# EAGLE board Discrete Datalogger ECU rev3 (EAGLE 8.6.0)
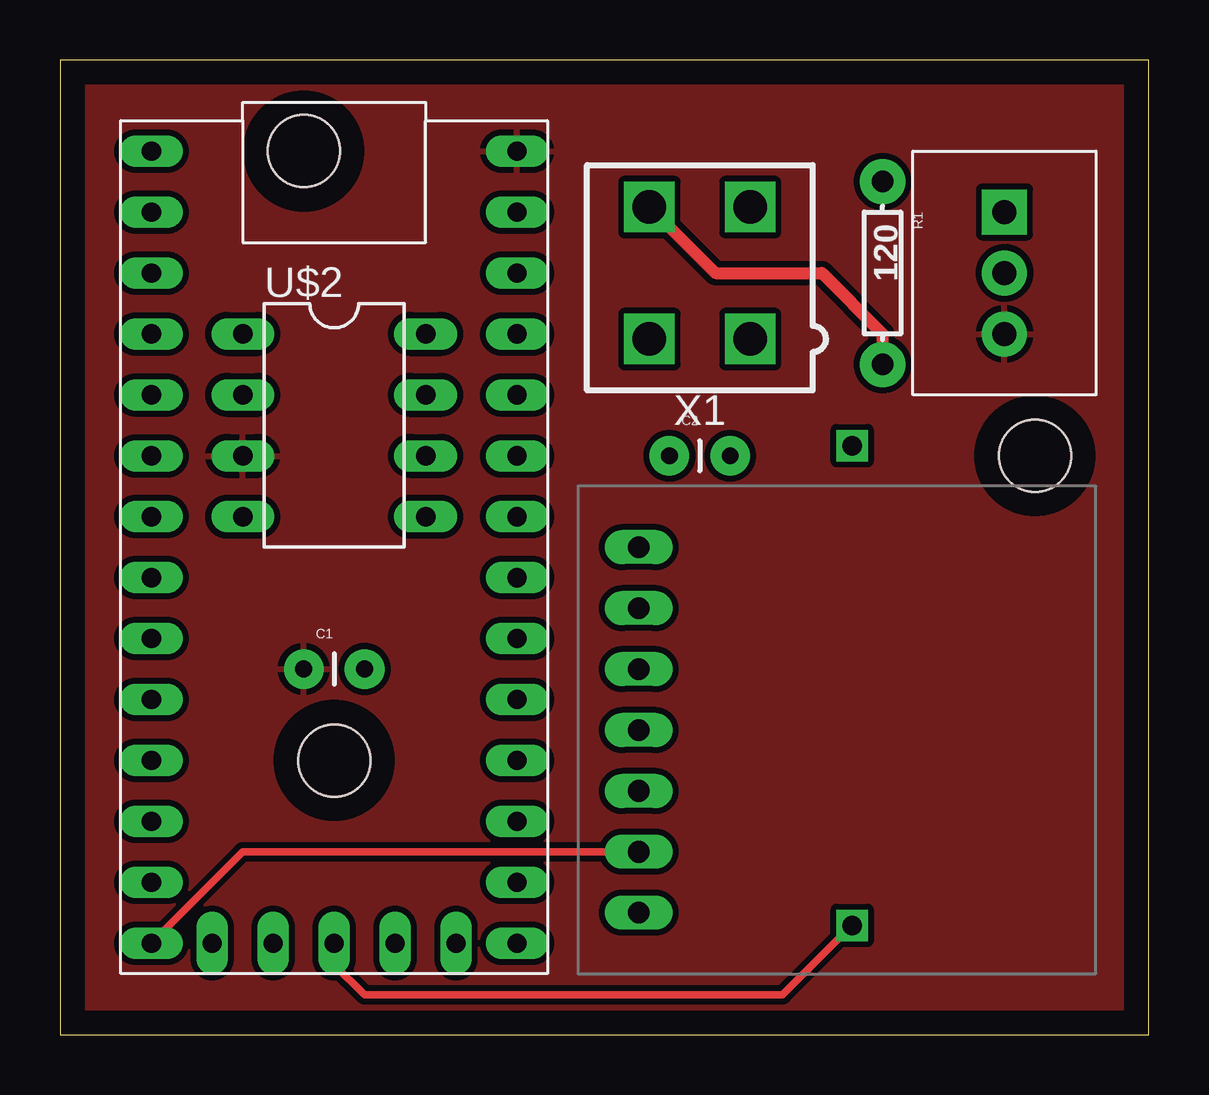
[diagram p0: board, top side]
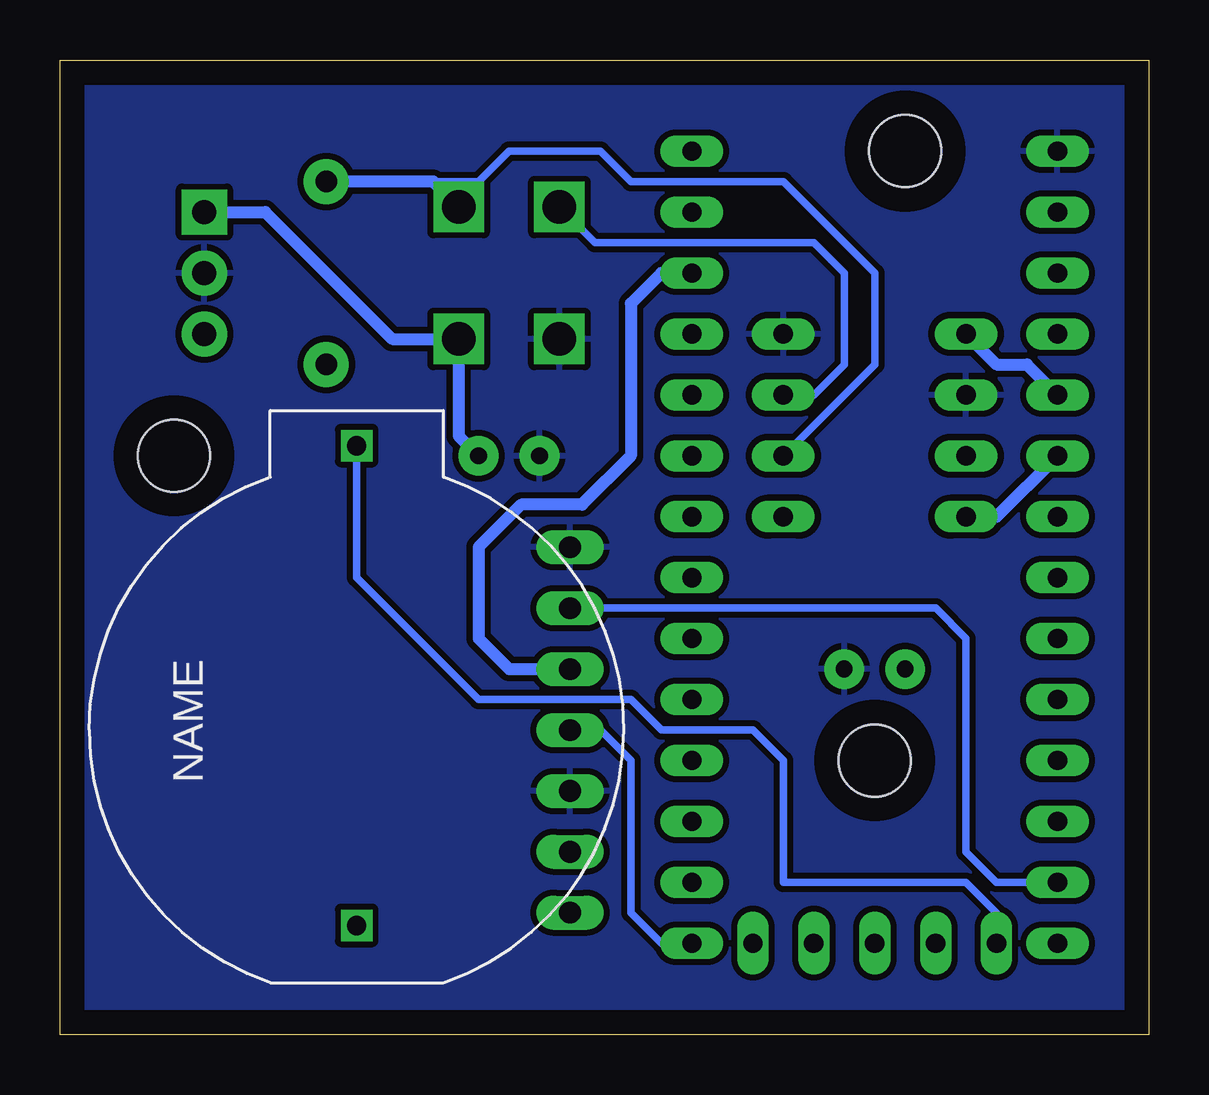
[diagram p1: board, bottom side, seen from below]

Size 45.39 x 40.63 mm. Coordinates in mm from the lower left corner, seen from the top.
Outline: 0,0 45.39,0 45.39,40.63 0,40.63 0,0
Copper layers (1*16): Top 0.035mm / dielectric 1.5mm / Bottom 0.035mm
Design rules "default *": minimum track width 6mil, minimum drill 0.35mm, track to track 10mil, track to pad 10mil, pad to pad 10mil, via to via 10mil, smd to smd 6mil, copper to edge 40mil, drill to drill 6mil, minimum pad ring 10mil, minimum via ring 8mil, stop-mask expansion 4mil, vias tented up to drill 0mil, thermal gap 10mil
Holes 3 mm at 10.16,36.83 40.64,24.13 11.43,11.43

## Footprints (pad centres in the part's own frame; a part is rotated, then mirrored left to right if it is on the bottom)
CAP-PTH-SMALL = drill 0.7 pad 1.651: 1 0,0; 2 2.54,0
TO-220 = drill 1 pad 1.88 square: 1 -2.54,0 | drill 1 pad 1.88: 2 0,0; 3 2.54,0
AXIAL-0.3 = drill 0.9 pad 1.88: P$1 -3.81,0; P$2 3.81,0
TEENSY_3.2_EXT = drill 0.8 long: 3.3V 16.51,29.21; 3.3V2 6.35,1.27; A0 16.51,3.81; A1 16.51,6.35; A2 16.51,8.89; A3 16.51,11.43; A4 16.51,13.97; A5 16.51,16.51; A6 16.51,19.05; A7 16.51,21.59; A8 16.51,24.13; A9 16.51,26.67; AGND 16.51,31.75; D0(RX1) 1.27,31.75; D1(TX1) 1.27,29.21; D2 1.27,26.67; D3(CANTX) 1.27,24.13; D4(CANRX) 1.27,21.59; D5 1.27,19.05; D6 1.27,16.51; D7(RX3) 1.27,13.97; D8(TX3) 1.27,11.43; D9(RX2) 1.27,8.89; D10(TX2) 1.27,6.35; D11 1.27,3.81; D12 1.27,1.27; D13 16.51,1.27; DAC 13.97,1.27; GND 1.27,34.29; GND2 8.89,1.27; PGRM 11.43,1.27; VBAT 3.81,1.27; VIN 16.51,34.29
DIL08 = drill 0.813 long: 1 -3.81,-3.81; 2 -1.27,-3.81; 3 1.27,-3.81; 4 3.81,-3.81; 5 3.81,3.81; 6 1.27,3.81; 7 -1.27,3.81; 8 -3.81,3.81
SDCARD_INTERFACE = drill 0.9 long: CD 2.54,0; CS 2.54,-15.24; DI 2.54,-12.7; DO 2.54,-2.54; GND 2.54,-5.08; SCK 2.54,-7.62; VCC 2.54,-10.16
COIN-CELL-HOLDER = drill 0.8 square: GND -8.15,0; VDD 11.85,0
MINIFIT_5566-4 = drill 1.4 square: 1 2.1,-2.75; 2 -2.1,-2.75; 3 2.1,2.75; 4 -2.1,2.75

## Placement (x,y rotation side)
C1  0.1uF  [CAP-PTH-SMALL]  10.16,15.24 0 top
C2  0.33uF  [CAP-PTH-SMALL]  25.4,24.13 0 top
IC1  [TO-220]  39.37,31.75 270 top
R1  120  [AXIAL-0.3]  34.29,31.75 270 top
U$1  TEENSY_3.2_EXT  [TEENSY_3.2_EXT]  2.54,2.54 0 top
U$2  MCP2551DIL  [DIL08]  11.43,25.4 270 top
U$3  SDCARD_INTERFACE  [SDCARD_INTERFACE]  26.67,5.08 180 top
U$4  COIN-CELL-HOLDER  [COIN-CELL-HOLDER]  33.02,12.7 90 bottom
X1  CONNECTOR-4  [MINIFIT_5566-4]  26.67,31.75 0 top

## Library data of the parts
C1 C2 IC1 R1 U$1-U$4 = HyTechDevices
X1 = HyTechDevices; OC_FARNELL: unknown; OC_NEWARK: unknown

## Nets
12V: C2.2 IC1.1 X1.1
CANH: R1.P$2 U$2.7 X1.4
CANL: R1.P$1 U$2.6 X1.3
GND: C1.2 C2.1 IC1.2 U$1.GND U$2.2 U$2.8 U$3.CS U$3.GND X1.2
N$1: U$1.VBAT U$4.VDD
N$2: U$1.GND2 U$4.GND
N$4: U$1.D3(CANTX) U$2.1
N$5: U$1.D4(CANRX) U$2.4
N$6: U$1.D13 U$3.SCK
N$7: U$1.D11 U$3.DI
N$8: U$1.3.3V U$3.VCC
N$9: U$1.D12 U$3.DO
VIN: C1.1 IC1.3 U$1.VIN U$2.3

## Tracks (layer width: path | path; a pad name or v marks a point on that pad's centre or on a via)
12V
  Bottom 0.508: IC1.1 36.83,34.29 31.54,29 X1.1 28.77,24.96 C2.2
CANH
  Top 0.508: X1.4 27.32,31.75 31.75,31.75 34.29,29.21 R1.P$2
  Bottom 0.305: U$2.7 13.97,26.67 12.7,27.94 12.7,31.75 13.97,33.02 23.09,33.02 X1.4
CANL
  Bottom 0.305: U$2.6 11.43,27.94 11.43,31.75 15.24,35.56 21.59,35.56 22.86,36.83 26.67,36.83 27.94,35.56 29.83,35.56
  Bottom 0.508: X1.3 29.83,35.56 R1.P$1
GND
  pour Bottom: 0,40.64 49.53,40.64 49.53,0 0,0
N$1
  Bottom 0.305: U$4.VDD 33.02,19.05 27.94,13.97 21.59,13.97 20.32,12.7 16.51,12.7 15.24,11.43 15.24,6.35 7.62,6.35 6.35,5.08 U$1.VBAT
N$2
  Top 0.305: U$4.GND 30.12,1.65 12.7,1.65 11.43,2.92 U$1.GND2
N$4
  Bottom 0.508: U$2.1 6.35,27.94 5.08,27.94 U$1.D3(CANTX)
N$5
  Bottom 0.508: U$2.4 6.35,21.59 U$1.D4(CANRX)
N$6
  Bottom 0.305: U$3.SCK 22.86,12.7 21.59,11.43 21.59,5.08 20.32,3.81 U$1.D13
N$7
  Bottom 0.305: U$3.DI 8.89,17.78 7.62,16.51 7.62,7.62 6.35,6.35 U$1.D11
N$8
  Bottom 0.508: U$1.3.3V 20.32,31.75 21.59,30.48 21.59,24.13 23.62,22.1 26.16,22.1 27.94,20.32 27.94,16.51 26.67,15.24 U$3.VCC
N$9
  Top 0.305: U$3.DO 7.62,7.62 U$1.D12
VIN
  pour Top: 0,40.64 49.53,40.64 49.53,0 0,0

## Text on the board
tDocu: Soohyun Kim